# Altium PCB KSP_PCB.PcbDoc (part 1 of 2)
Units mm, origin at the board's own origin, x right, y up, seen from the top; angles counter-clockwise.
Board outline 121 x 121 mm, 2 copper layers (Top Layer, Bottom Layer), stack 1.571 mm thick; 210 components, 141 nets, 724 pads, 132 vias.
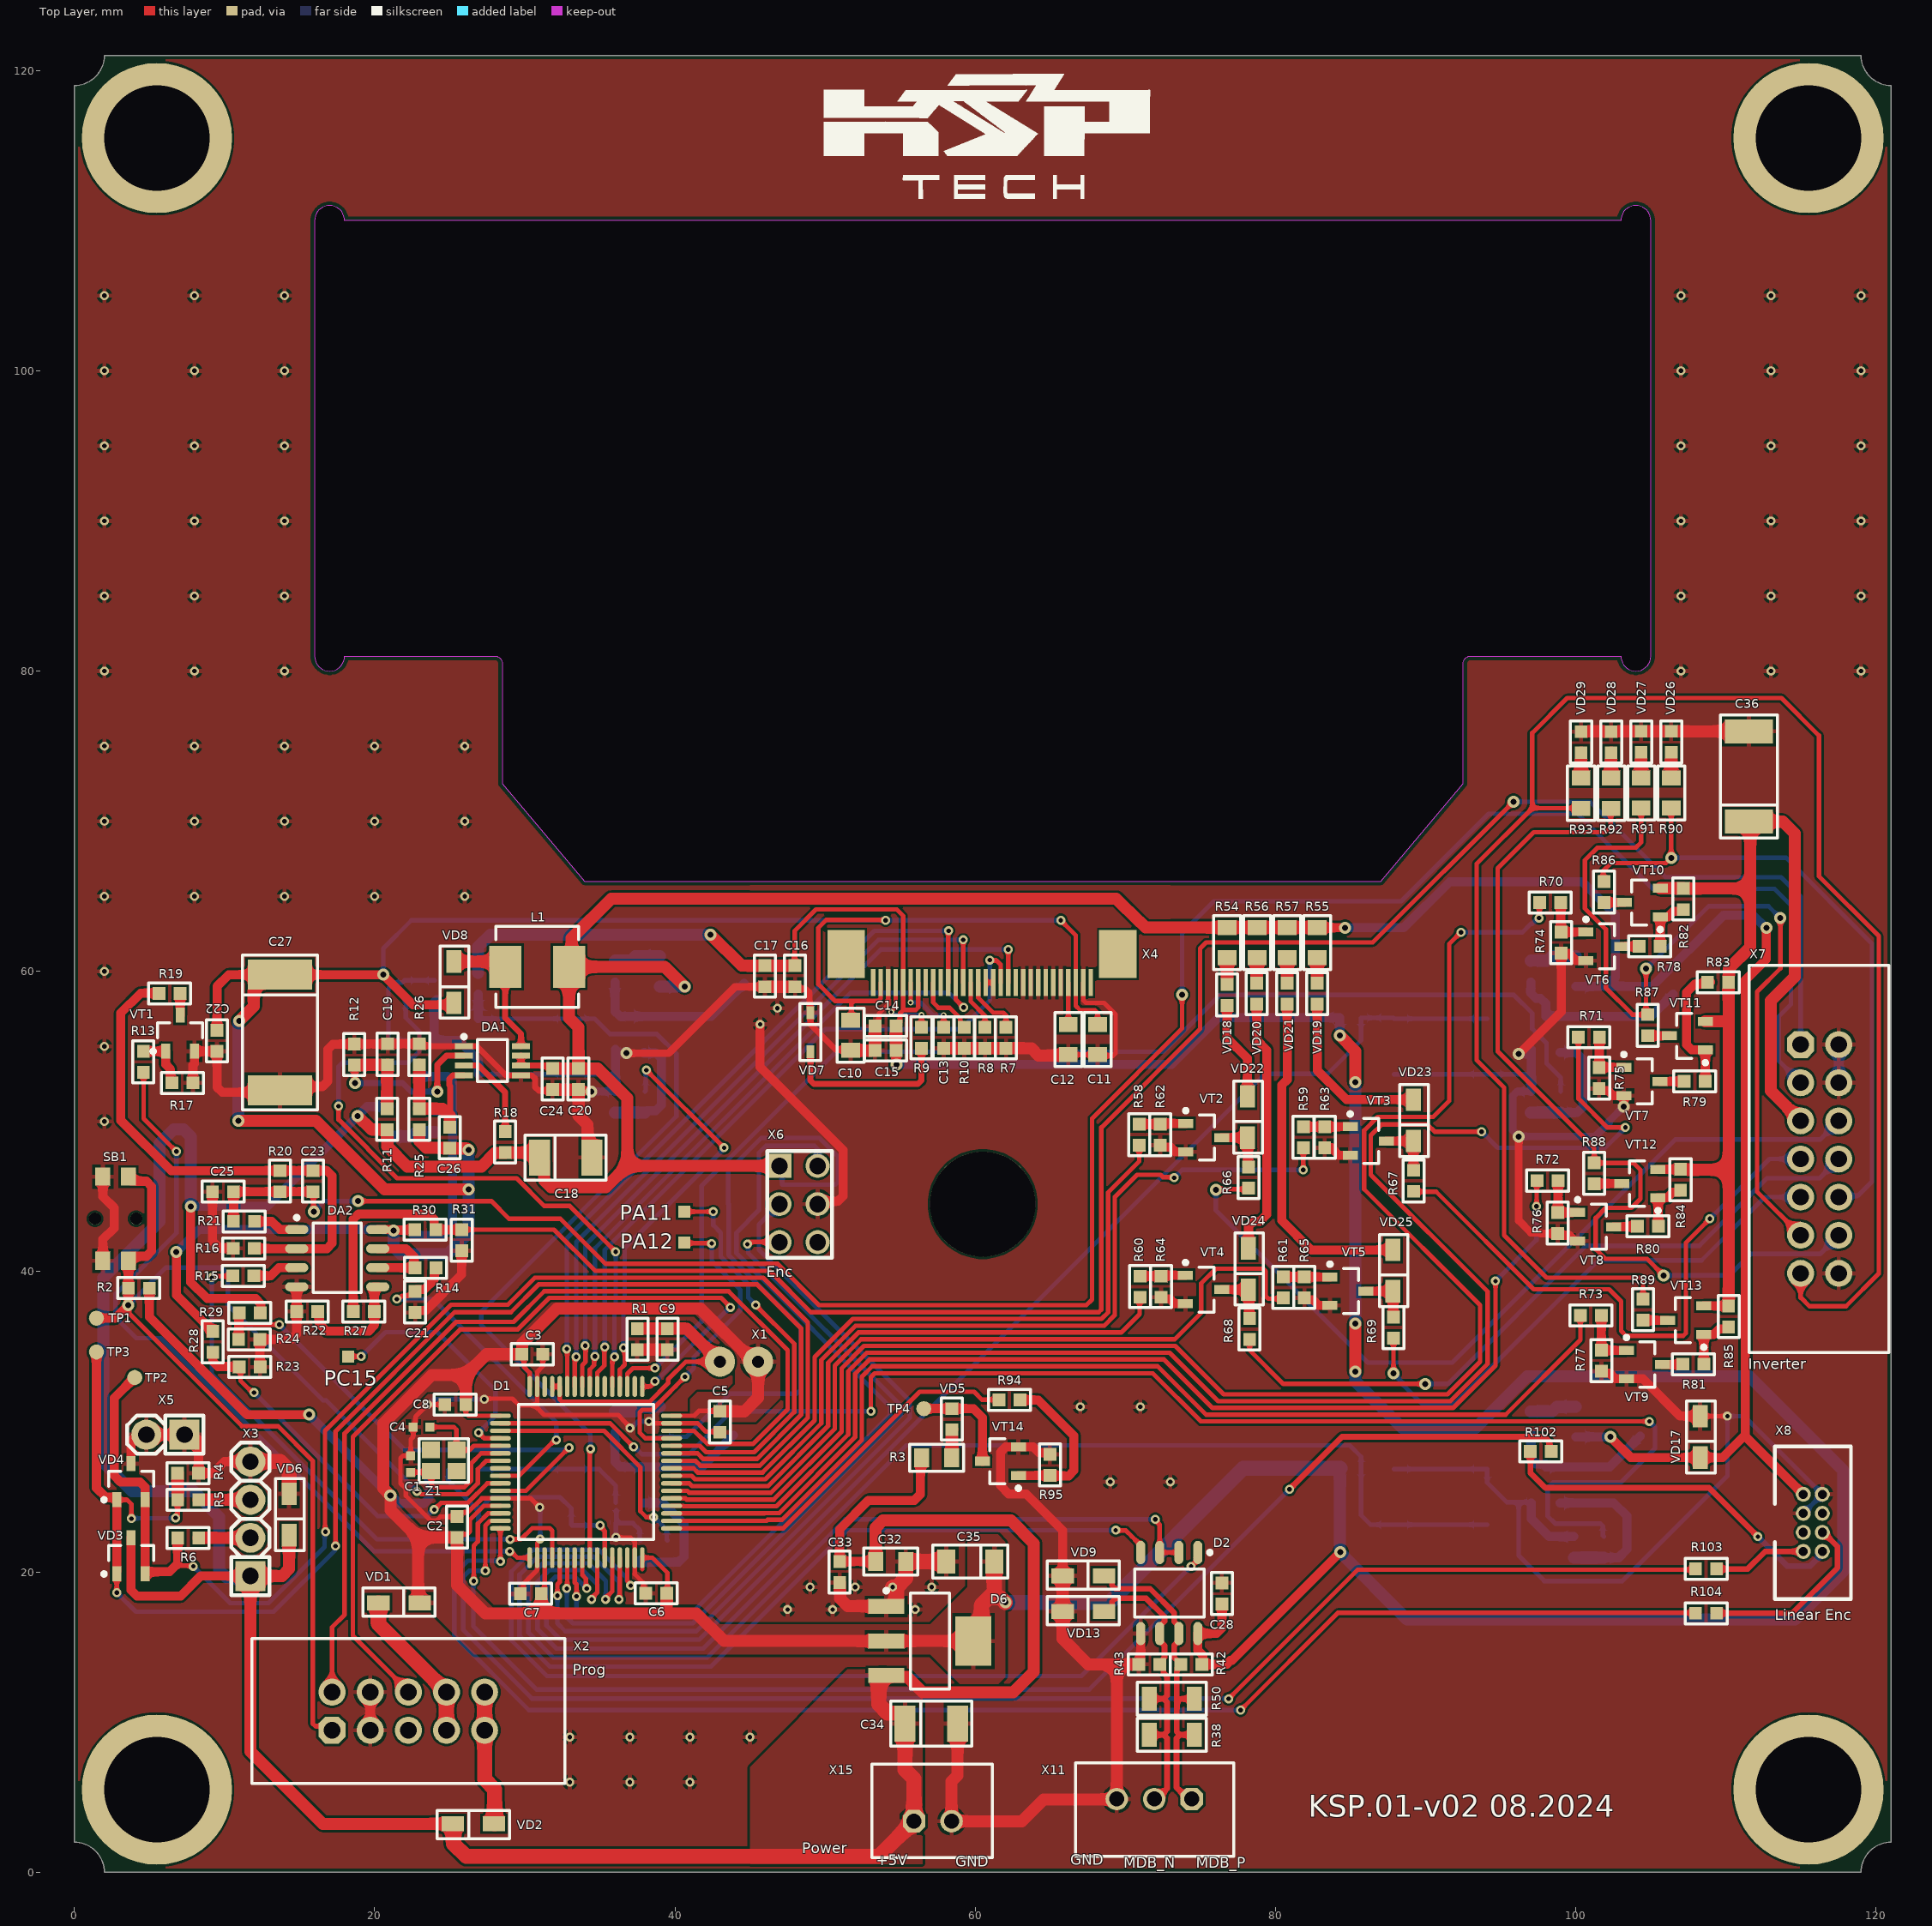
[diagram p0: Top Layer view]
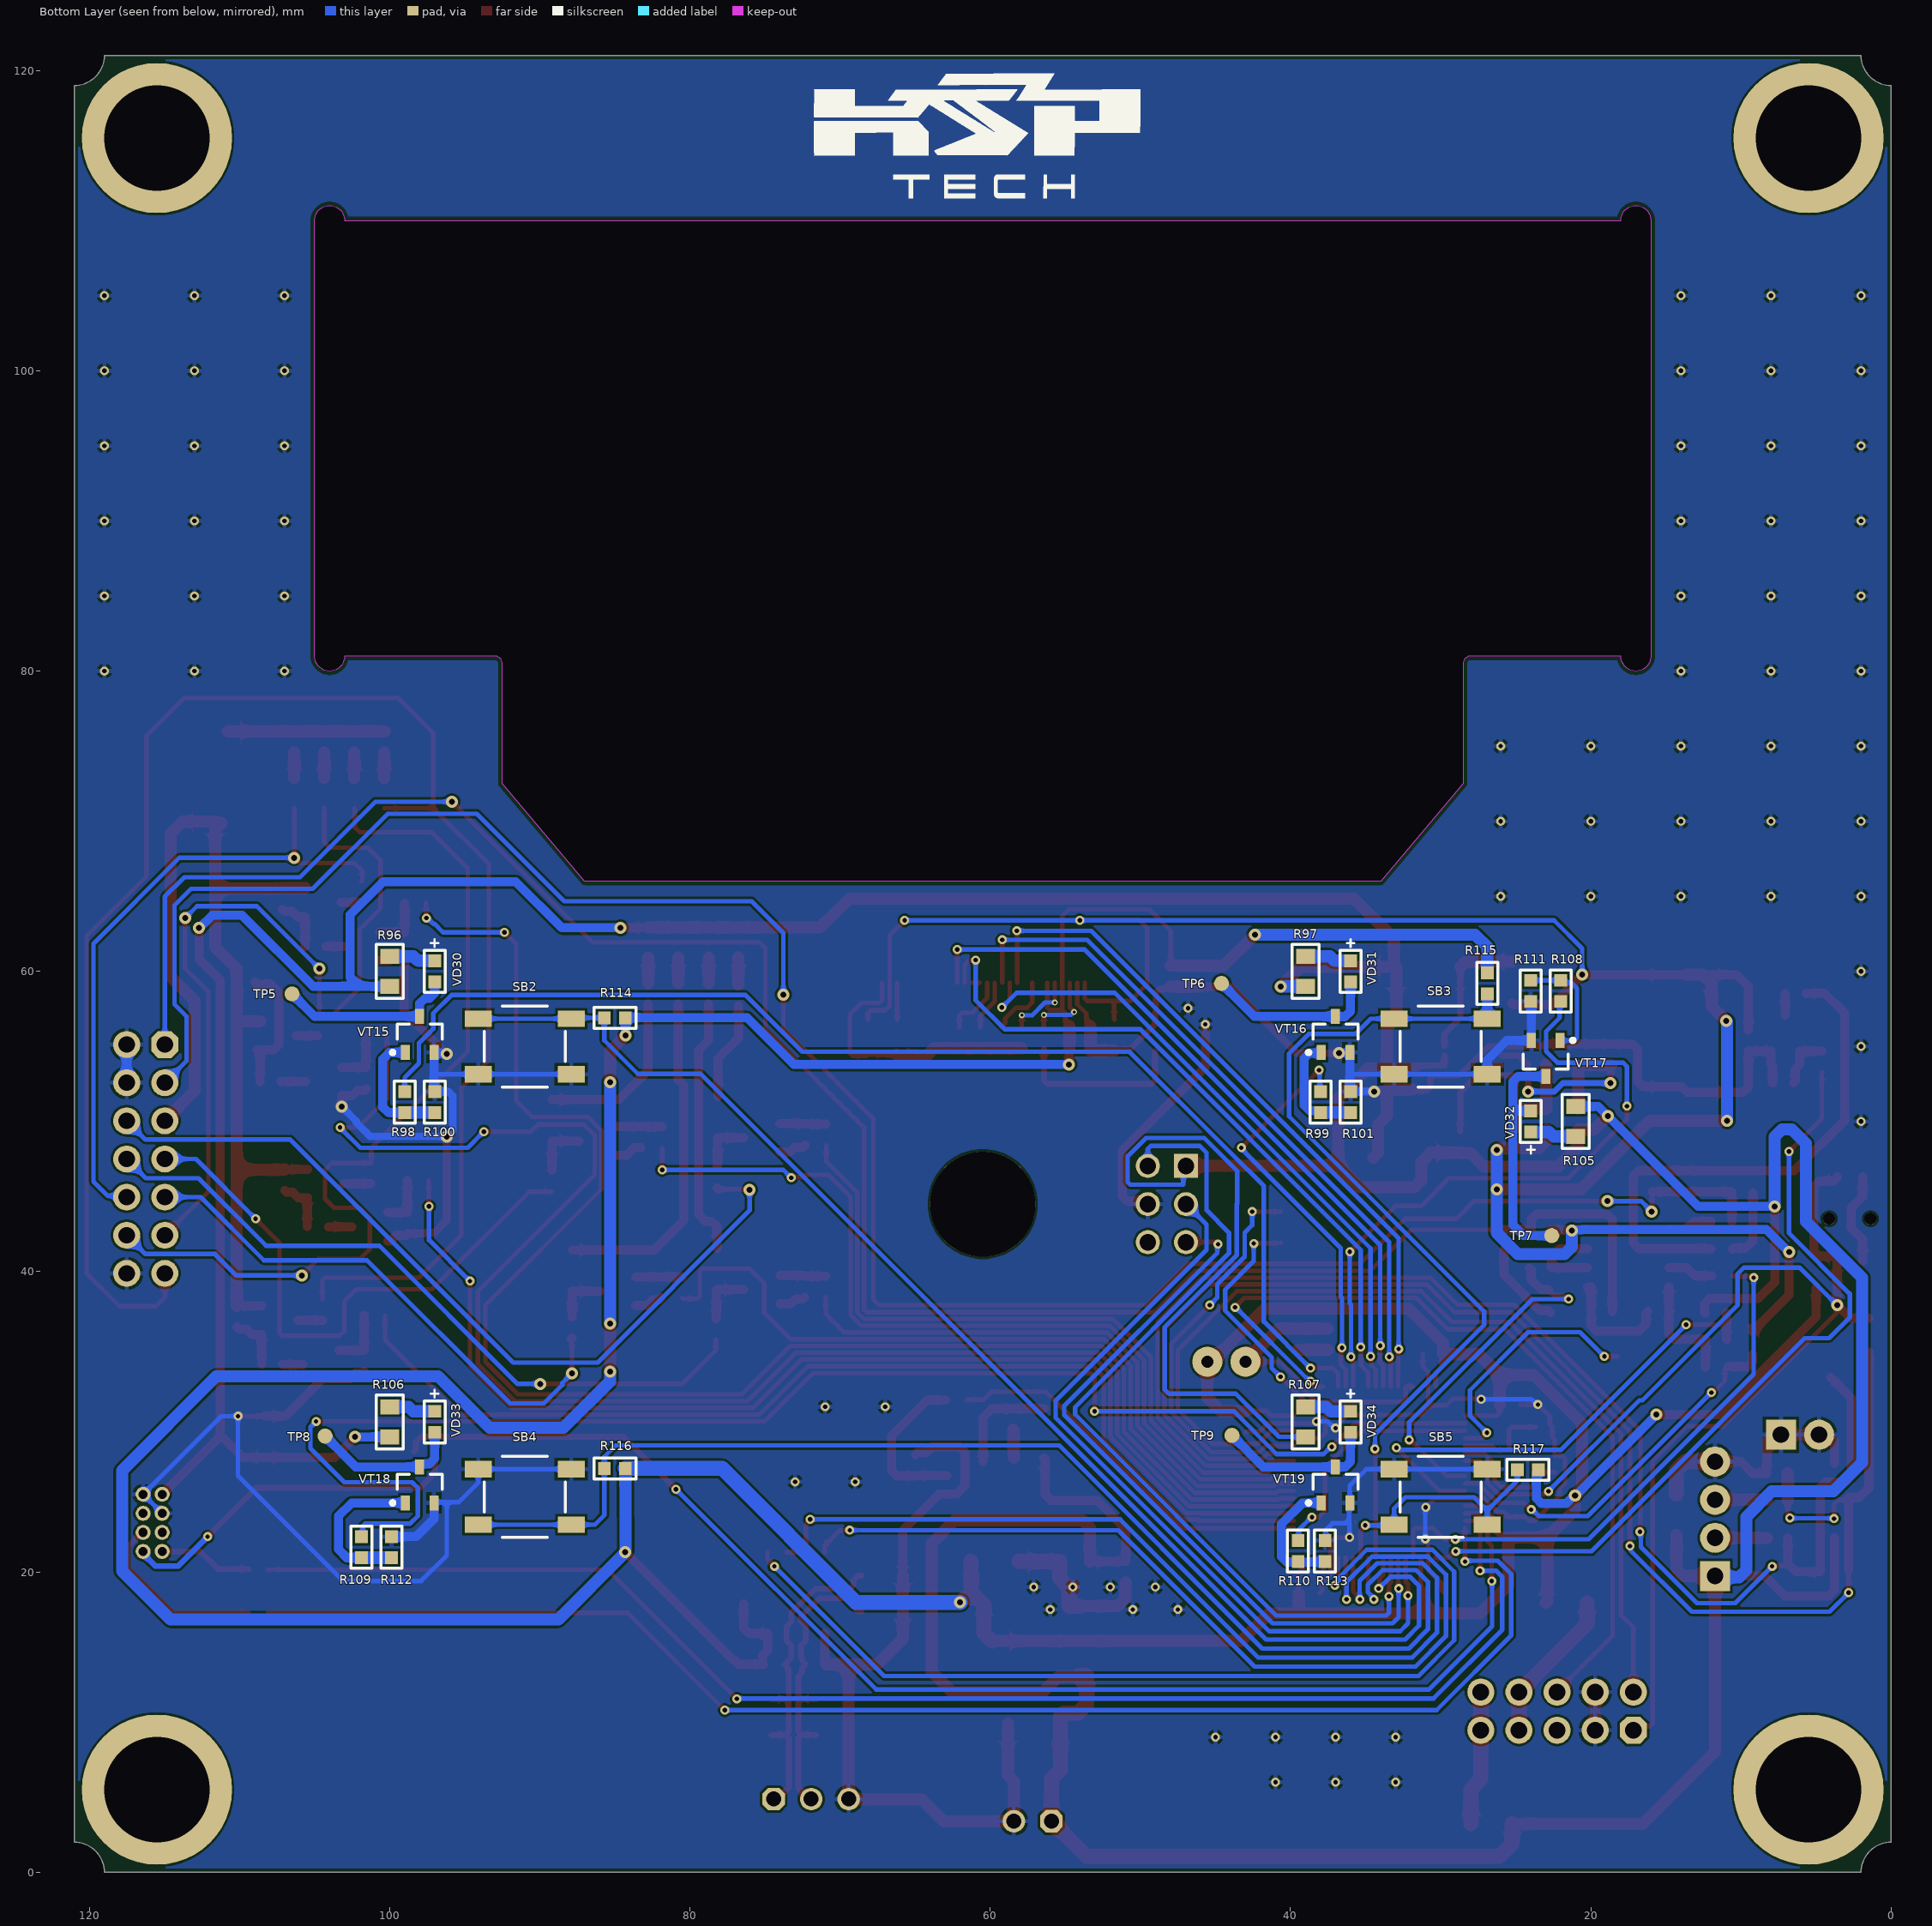
[diagram p1: Bottom Layer view, seen from below]
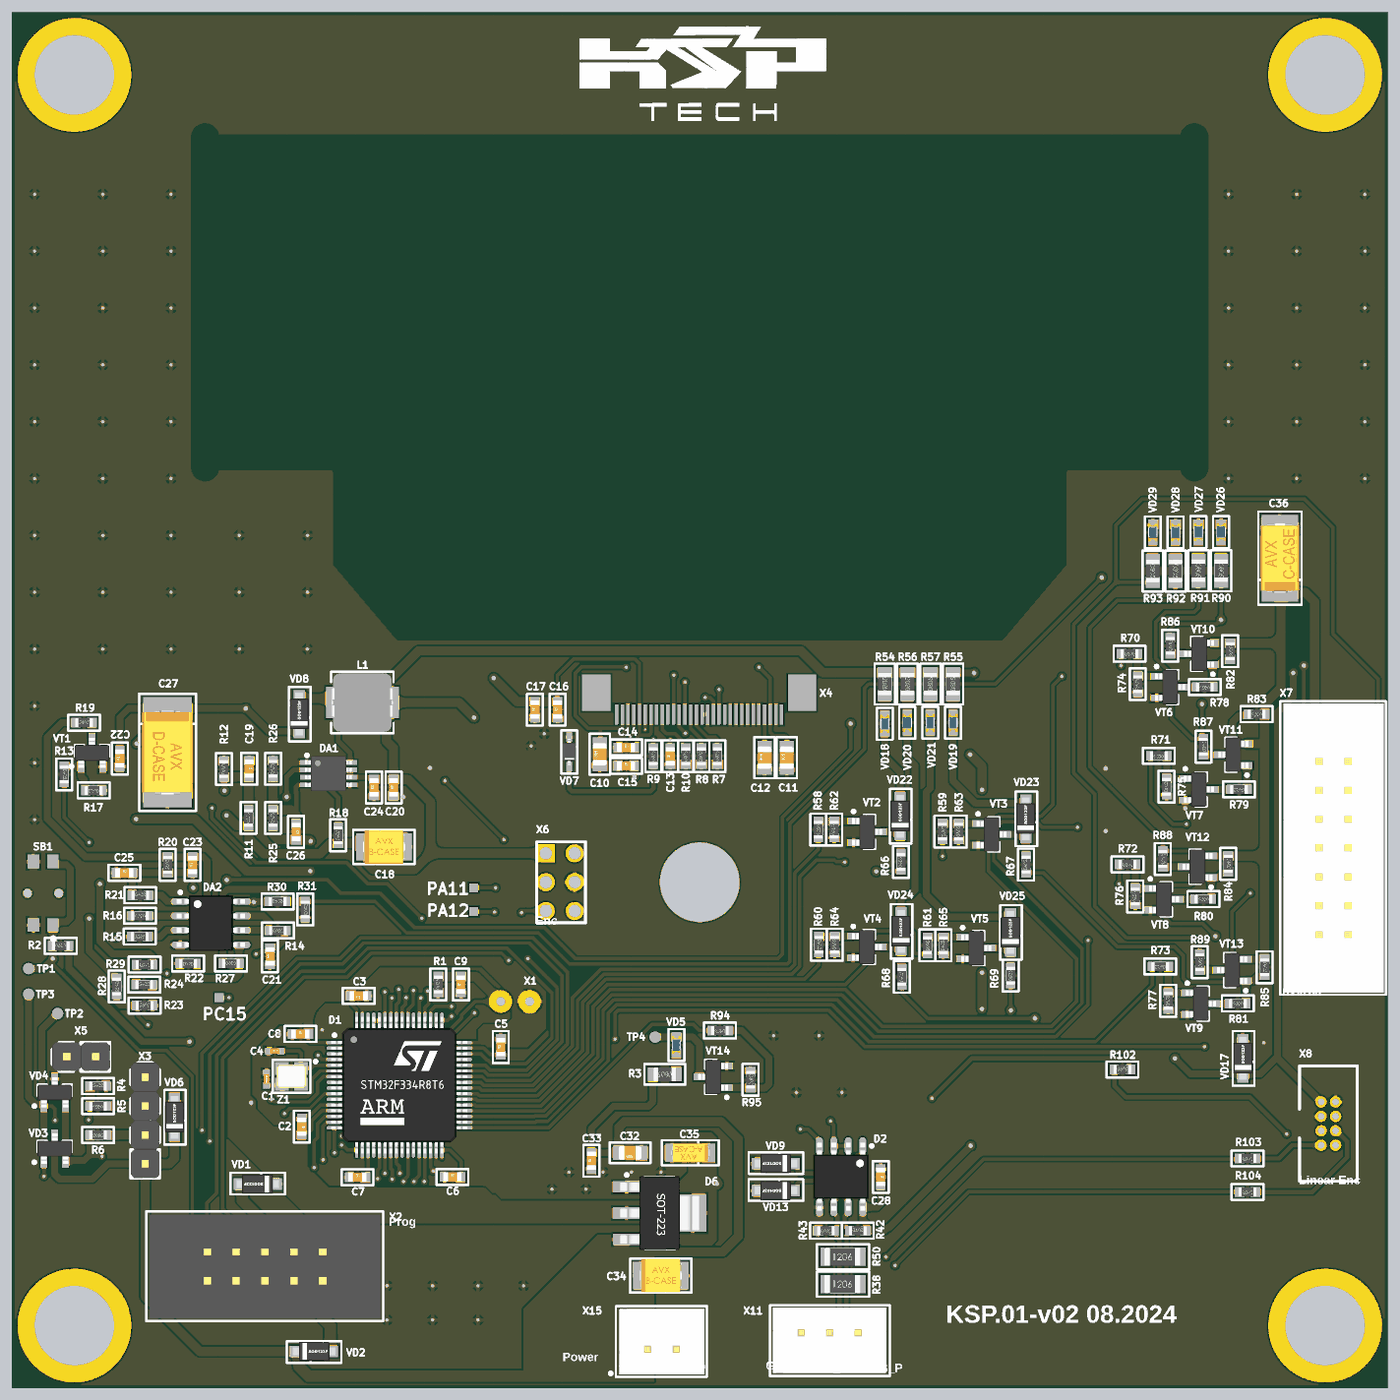
[diagram p3: 3D render of the assembled board from above, using the file's embedded part models]
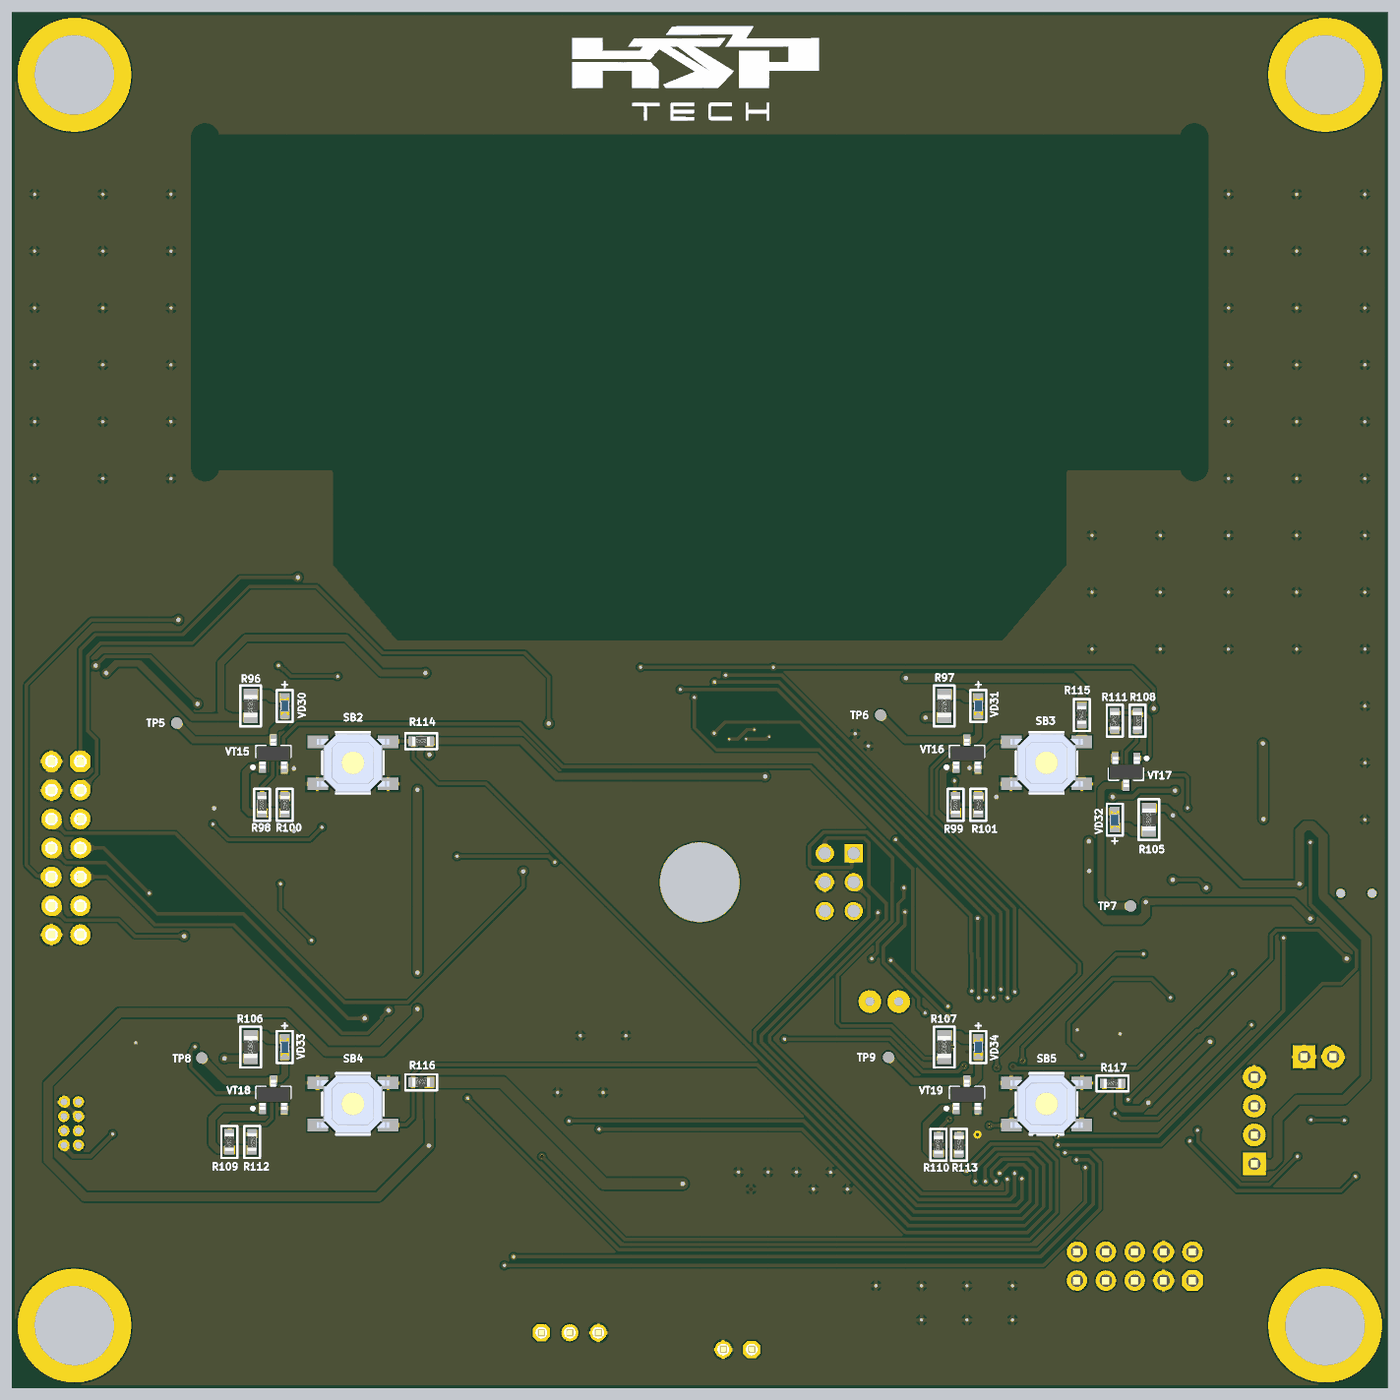
[diagram p4: 3D render of the assembled board from below, using the file's embedded part models]

## Layer stack, top to bottom
Top Solder: solder mask 0.0102, Solder Resist, Dk 3.5
Top Layer: signal copper 0.0356
Dielectric 1: dielectric 1.5, FR-4, Dk 4.8
Bottom Layer: signal copper 0.0356
Bottom Solder: solder mask 0.0102, Solder Resist, Dk 3.5

## Board outline
0,2 0,119 ccw(c0,121) 2,121 119,121 ccw(c121,121) 121,119 121,2 ccw(c121,0) 119,0 2,0 ccw(c0,0)
cut-out: 18,81 28,81 cw(c28,80.5) 28.5,80.5 28.5,72.5 34,66 87,66 92.5,72.5 92.5,80.5 cw(c93,80.5) 93,81 103,81 ccw(c104,81) 104,80 ccw(c104,81) 105,81 105,110 ccw(c104,110) 104,111 ccw(c104,110) 103,110 18,110 ccw(c17,110) 17,111 ccw(c17,110) 16,110 16,81 ccw(c17,81) 17,80 ccw(c17,81)

## Design rules (kind name [scope] priority, off if disabled: settings)
AcuteAngle [All] p1: minimum=3.50000000000000E+0001 checktracksonly=FALSE
BoardOutlineClearance "BoardOutlineClearance 1" [All] p1: gap=0.25 ignorepadtopadclearanceinfootprint=FALSE except(0: Arc-SplitContinuation Track-SplitContinuation SMDPad-SplitContinuation THPad-SplitContinuation Via-SplitContinuation Fill-SplitContinuation Poly-SplitContinuation Region-SplitContinuation Text-SplitContinuation) // Milling
BoardOutlineClearance "BoardOutlineClearance 2" [All] p2: gap=0.4 ignorepadtopadclearanceinfootprint=FALSE except(0: Arc-SplitContinuation Track-SplitContinuation SMDPad-SplitContinuation THPad-SplitContinuation Via-SplitContinuation Fill-SplitContinuation Poly-SplitContinuation Region-SplitContinuation Text-SplitContinuation) // V-Cut
Clearance "Clearance-1 1/2 Oz" [All] p1: gap=0.15 ignorepadtopadclearanceinfootprint=FALSE // Standart
ComponentClearance [All] p1: gap=0 collisioncheckmode=3 verticalgap=0 showdistances=FALSE
DiffPairsRouting "DiffPairsRouting 1/2 Oz" [All] p1: maxlimit=0.254 minlimit=0.1 mostfreqgap=0.254 toplayer_minwidth=0.1 toplayer_maxwidth=0.381 toplayer_prefwidth=0.381 bottomlayer_minwidth=0.1 bottomlayer_maxwidth=0.381 bottomlayer_prefwidth=0.381 maxuncoupledlength=12.7
HoleSize "Minimum HoleSize VIA 1" [IsVia] p1: absolutevalues=TRUE maxlimit=5.9 minlimit=0.3 maxpercent=80.000 minpercent=20.000 // Standart
HoleToHoleClearance Hole2HoleClearance [All] p1: gap=0.25 allowstackedmicrovias=FALSE
MinimumAnnularRing "Minimum AR VIA Standart" [IsVia] p1: minimumring=0.15
MinimumAnnularRing "Minimum AR PAD Standart" [IsPAD] p2: minimumring=0.2
MinimumAnnularRing "Minimum AR VIA Advance" [IsVia] p3: minimumring=0.1
MinimumAnnularRing "Minimum AR PAD Advance" [IsPAD] p4: minimumring=0.15
MinimumSolderMaskSliver "SolderMask Bridge Standart" [All] p1: minsoldermaskwidth=0.15 // All Masks
MinimumSolderMaskSliver "SolderMask Bridge Advance" [All] p2: minsoldermaskwidth=0.1 // Mask LDI
PlaneClearance "PlaneClearance-1 1/2 Oz" [All] p1: clearance=0.2 // Standart
PlaneClearance "PlaneClearance-2 1/2 Oz" [All] p2: clearance=0.15 // Advance
PlaneConnect "TermalConnect-1 1/2 Oz" [All] p1: planeconnectstyle=Relief reliefexpansion=0.2 reliefentries=4 reliefconductorwidth=0.4 reliefairgap=0.2 // Standart
PlaneConnect "TermalConnect-2 1/2 Oz" [All] p2: pad.planeconnectstyle=Relief pad.reliefexpansion=0.15 pad.reliefentries=4 pad.reliefconductorwidth=0.15 pad.reliefairgap=0.15 via.planeconnectstyle=Direct via.reliefexpansion=0.15 via.reliefentries=4 via.reliefconductorwidth=0.15 via.reliefairgap=0.15 // Advance
PolygonConnect "PolygonConnect-1 1/2 Oz" [All] p1: thpad.connectstyle=Relief thpad.reliefconductorwidth=0.3 thpad.reliefentries=4 thpad.polygonreliefangle="90 Angle" thpad.airgapwidth=0.2 smdpad.connectstyle=Relief smdpad.reliefconductorwidth=0.3 smdpad.reliefentries=4 smdpad.polygonreliefangle="90 Angle" smdpad.airgapwidth=0.2 via.connectstyle=Direct via.reliefconductorwidth=0.254 via.reliefentries=4 via.polygonreliefangle="90 Angle" via.airgapwidth=0.254 // Standart
RoutingCorners [All] p1 off: cornerstyle=45-Degree minsetback=2.54 maxsetback=2.54
RoutingVias [All] p1: holewidth=0.3 width=0.6 viastyle="Through Hole" minholewidth=0.2 minwidth=0.4 maxholewidth=5.9 maxwidth=6.4
SilkToSilkClearance Silk2SilkClearance [All] p1 off: silktosilkclearance=0.15
SilkToSolderMaskClearance Silk2SolderMaskClearance [IsPad] p1 off: minsilkscreentomaskgap=0.15 clearancetoexposedcopper=TRUE
SolderMaskExpansion SolderMaskExpansion-1 [All] p1: expansion=0.05 istentingtop=FALSE // Standart
SolderMaskExpansion "SolderMaskExpansion LDI" [All] p2: expansion=0.025 istentingtop=FALSE // Advance
SupplyNets "Schematic Supply Nets_2" [InNet('12V')] p1: voltage=12,00
SupplyNets "Schematic Supply Nets_1" [InNet('5V')] p2: voltage=5,000
SupplyNets "Schematic Supply Nets" [InNet('3.3V')] p3: voltage=3,000
UnRoutedNet [All] p1: checkbadconnections=TRUE
Width "Width 1/2 Oz" [All] p1: maxlimit=10 minlimit=0.1 preferedwidth=1 checkconnectedcopper=TRUE
19 further rules are at their usual default settings.

## Classes and differential pairs
component class 3_RK: C36 R54 R55 R56 R57 R58 R59 R60 R61 R62 R63 R64 R65 R66 R67 R68 R69 R70 R71 R72 R73 R74 R75 R76 R77 R78 R79 R80 R81 R82 R83 R84 R85 R86 R87 R88 R89 R90 R91 R92 R93 VD18 VD19 VD20 VD21 VD22 VD23 VD24 VD25 VD26 VD27 VD28 VD29 VT2 VT3 VT4 VT5 VT6 VT7 VT8 VT9 VT10 VT11 VT12 VT13
component class 2_Connection: C18 C19 C20 C21 C22 C23 C24 C25 C26 C27 C28 C32 C33 C34 C35 D2 D6 DA1 DA2 L1 R11 R12 R13 R14 R15 R16 R17 R18 R19 R20 R21 R22 R23 R24 R25 R26 R27 R28 R29 R30 R31 R38 R42 R43 R50 R96 R97 R98 R99 R100 R101 R102 R103 R104 R105 R106 R107 R108 R109 R110 R111 R112 R113 R114 R115 R116 R117 SB2 SB3 SB4 SB5 TP5 TP6 TP7 TP8 TP9 VD8 VD9 VD13 VD17 VD30 VD31 VD32 VD33 VD34 VT1 VT15 VT16 VT17 VT18 VT19 X6 X7 X8 X11 X15
component class 1_uC: C1 C2 C3 C4 C5 C6 C7 C8 C9 C10 C11 C12 C13 C14 C15 C16 C17 D1 R1 R2 R3 R4 R5 R6 R7 R8 R9 R10 R94 R95 SB1 TP1 TP2 TP3 TP4 VD1 VD2 VD3 VD4 VD5 VD6 VD7 VT14 X1 X2 X3 X4 X5 Z1
differential pair MODBUS: +MODBUS_P -MODBUS_N

## Components (designator, comment, footprint, x,y, rotation, side; value= is the part's Value field where it differs from the comment)
C1 "10p" CH0402C 22.4,27.175 r270 top
C2 "0.1u" CH0603C 25.5,23 r270 top
C3 "0.1u" CH0603C 30.5,34.5 r180 top
C4 "10p" CH0402C 23.125,29.65 r0 top
C5 "0.1u" CH0603C 43,30 r90 top
C6 "0.1u" CH0603C 38.75,18.575 r0 top
C7 "0.1u" CH0603C 30.399,18.549 r0 top
C8 "0.1u" CH0603C 25.375,31.15 r0 top
C9 "0.1u" CH0603C 39.5,35.5 r90 top
C10 "4.7u, 25V" CH0805C 51.7,55.75 r90 top
C11 "4.7u, 25V" CH0805C 68.15,55.45 r90 top
C12 "4.7u, 25V" CH0805C 66.2,55.45 r90 top
C13 "1u" CH0603C 57.9,55.575 r90 top
C14 "4.7u" CH0603C 54.025,56.35 r0 top
C15 "0.1u" CH0603C 54.025,54.725 r0 top
C16 "4.7u" CH0603C 48,59.675 r90 top
C17 "0.1u" CH0603C 46,59.675 r90 top
C18 "47uF" TANTAL_B 32.725,47.6 r0 top
C19 "0.1u" CH0603C 20.875,54.475 r270 top
C20 "10u" CH0603C 33.575,52.825 r90 top
C21 "0.022u, 50V" CH0603C 22.7,37.975 r90 top
C22 "0.1u, 25V" CH0603C 9.5,55.375 r90 top
C23 "1n" CH0603C 15.9,46.025 r90 top
C24 "0.1u" CH0603C 31.85,52.825 r90 top
C25 "0.022u, 50V" CH0603C 9.9,45.325 r0 top
C26 "39p" CH0603C 25,48.925 r270 top
C27 "68uF" TANTAL_D 13.7,55.925 r270 top
C28 "0.1u" CH0603C 76.425,18.575 r270 top
C32 "10u" CH0805C 54.375,20.7 r180 top
C33 "0.1 u" CH0603C 50.975,20 r90 top
C34 "68uF" TANTAL_B 57.075,9.9 r0 top
C35 "47uF" TANTAL_A 59.675,20.7 r180 top
C36 "4.7uF" TANTAL_C 111.525,72.99 r90 top
D1 "STM32F103RBT6" 64-LQFP 34.075,26.65 r0 top
D2 "ADM3485ARZ" 8-SOIC 72.925,18.6 r270 top
D6 "LM1117GS-3.3" SOT223 56.975,15.4 r0 top
DA1 "LM2621AMMX" 8-SSOP 27.85,54.05 r0 top
DA2 "OP295GSZ-REEL7" 8-SOIC 17.508,40.899 r0 top
L1 "10u" "IND: IHLP2020" 30.825,60.3 r0 top
R1 "10k" CH0603R 37.5,35.5 r90 top
R2 "10k" CH0603R 4.3,38.9 r0 top
R3 "1k" CH0805R 57.425,27.6 r180 top
R4 "10k" CH0603R 7.575,26.575 r0 top
R5 "100" CH0603R 7.583,24.806 r180 top
R6 "100" CH0603R 7.583,22.266 r180 top
R7 "10k" CH0603R 62.05,55.575 r90 top
R8 "10k" CH0603R 60.65,55.575 r90 top
R9 "50" CH0603R 56.425,55.575 r90 top
R10 "604k" CH0603R 59.275,55.575 r90 top
R11 "10k" CH0603R 20.825,50.15 r90 top
R12 "DNP" CH0603R 18.65,54.45 r90 top
R13 "100" CH0603R 4.6,53.975 r270 top
R14 "100" CH0603R 23.4,40.25 r180 top
R15 "3.32k" CH0603R 11.25,39.725 r180 top
R16 "17.8k" CH0603R 11.275,41.55 r180 top
R17 "4.7k" CH0603R 7.2,52.575 r180 top
R18 "76.8k" CH0603R 28.7,48.625 r90 top
R19 "6.49k" CH0603R 6.35,58.525 r0 top
R20 "10k" CH0603R 13.7,46.025 r90 top
R21 "10" CH0603R 11.3,43.35 r0 top
R22 "4.7k" CH0603R 15.5,37.35 r180 top
R23 "2.7k" CH0603R 11.675,33.65 r0 top
R24 "10k" CH0603R 11.644,35.491 r0 top
R25 "130k" CH0603R 22.975,50.15 r90 top
R26 "15k" CH0603R 22.975,54.475 r90 top
R27 "10k" CH0603R 19.275,37.35 r0 top
R28 "10k" CH0603R 9.225,35.325 r270 top
R29 "10k" CH0603R 11.675,37.25 r180 top
R30 "1M" CH0603R 23.375,42.8 r0 top
R31 "10k" CH0603R 25.8,42.1 r270 top
R38 "120" CH1206R 73.1,9.15 r0 top
R42 "1.2k" CH0603R 74.4,13.85 r0 top
R43 "1.2k" CH0603R 71.6,13.85 r180 top
R50 "Var" CH1206R 73.1,11.55 r0 top
R54 "1k" CH0805R 76.775,61.925 r90 top
R55 "1k" CH0805R 82.775,61.925 r90 top
R56 "1k" CH0805R 78.775,61.925 r90 top
R57 "1k" CH0805R 80.775,61.925 r90 top
R58 "100" CH0603R 70.925,49.125 r270 top
R59 "100" CH0603R 81.85,48.95 r270 top
R60 "100" CH0603R 70.975,39 r270 top
R61 "100" CH0603R 80.525,38.95 r270 top
R62 "4.7k" CH0603R 72.325,49.125 r90 top
R63 "4.7k" CH0603R 83.275,48.95 r90 top
R64 "4.7k" CH0603R 72.375,39 r90 top
R65 "4.7k" CH0603R 81.925,38.95 r90 top
R66 "10" CH0603R 78.2,46.275 r90 top
R67 "10" CH0603R 89.2,46.05 r90 top
R68 "10" CH0603R 78.275,36.175 r90 top
R69 "10" CH0603R 87.85,36.275 r90 top
R70 "100" CH0603R 98.3,64.59 r180 top
R71 "100" CH0603R 100.875,55.615 r180 top
R72 "100" CH0603R 98.125,46.065 r180 top
R73 "100" CH0603R 101,37.09 r180 top
R74 "4.7k" CH0603R 99.025,61.915 r90 top
R75 "4.7k" CH0603R 101.55,52.89 r90 top
R76 "4.7k" CH0603R 98.8,43.24 r90 top
R77 "4.7k" CH0603R 101.7,34.065 r90 top
R78 "100" CH0603R 104.925,61.665 r180 top
R79 "100" CH0603R 107.925,52.665 r180 top
R80 "100" CH0603R 104.8,43.015 r180 top
R81 "100" CH0603R 107.825,33.84 r180 top
R82 "4.7k" CH0603R 107.15,64.815 r270 top
R83 "4.7k" CH0603R 109.475,59.275 r180 top
R84 "4.7k" CH0603R 106.975,46.115 r270 top
R85 "4.7k" CH0603R 110.175,37.015 r270 top
R86 "10" CH0603R 101.875,65.29 r270 top
R87 "10" CH0603R 104.8,56.415 r270 top
R88 "10" CH0603R 101.225,46.54 r270 top
R89 "10" CH0603R 104.475,37.465 r270 top
R90 "1k" CH0805R 106.35,71.89 r270 top
R91 "1k" CH0805R 104.35,71.89 r270 top
R92 "1k" CH0805R 102.35,71.865 r270 top
R93 "1k" CH0805R 100.35,71.865 r270 top
R94 "100" CH0603R 62.275,31.45 r180 top
R95 "4.7k" CH0603R 64.975,27.125 r270 top
R96 "1k" CH0805R 100,60 r270 bottom
R97 "1k" CH0805R 39,60 r270 bottom
R98 "100" CH0603R 99,51.3 r90 bottom
R99 "100" CH0603R 38,51.3 r90 bottom
R100 "4.7k" CH0603R 97,51.3 r270 bottom
R101 "4.7k" CH0603R 36,51.3 r270 bottom
R102 "DNP" CH0603R 97.675,28.025 r0 top
R103 "DNP" CH0603R 108.675,20.2 r180 top
R104 "DNP" CH0603R 108.675,17.25 r180 top
R105 "1k" CH0805R 21,50 r90 bottom
R106 "1k" CH0805R 100,30 r270 bottom
R107 "1k" CH0805R 39,30 r270 bottom
R108 "100" CH0603R 22,58.7 r270 bottom
R109 "100" CH0603R 101.874,21.65 r90 bottom
R110 "100" CH0603R 39.5,21.4 r90 bottom
R111 "4.7k" CH0603R 24,58.7 r90 bottom
R112 "4.7k" CH0603R 99.874,21.65 r270 bottom
R113 "4.7k" CH0603R 37.7,21.4 r270 bottom
R114 "10k" CH0603R 85,56.9 r180 bottom
R115 "10k" CH0603R 26.9,59.2 r90 bottom
R116 "10k" CH0603R 85,26.9 r180 bottom
R117 "10k" CH0603R 24.2,26.8 r180 bottom
SB1 "\"Кнопка\"" TL1014BF160QG 4.125,43.525 r270 top
SB2 "\"Кнопка\"" "BUT: SKQGADE010" 91,55 r180 bottom locked
SB3 "\"Кнопка\"" "BUT: SKQGADE010" 30,55 r180 bottom locked
SB4 "\"Кнопка\"" "BUT: SKQGADE010" 91,25 r0 bottom locked
SB5 "\"Кнопка\"" "BUT: SKQGADE010" 30,25 r0 bottom locked
TP1 "=value" TestPoint#1 1.475,36.9 r90 top
TP2 "=value" TestPoint#1 4.025,32.95 r90 top
TP3 "=value" TestPoint#1 1.475,34.65 r90 top
TP4 "=value" TestPoint#1 56.575,30.875 r180 top
TP5 "=value" TestPoint#1 106.5,58.5 r90 bottom
TP6 "=value" TestPoint#1 44.6,59.2 r90 bottom
TP7 "=value" TestPoint#1 22.6,42.4 r90 bottom
TP8 "=value" TestPoint#2 104.3,28.125 r90 bottom
TP9 "=value" TestPoint#1 43.9,29.1 r90 bottom
VD1 "PMEG6010CEH" SOD123F 21.625,17.95 r0 top
VD2 "PMEG6010CEH" SOD123F 26.575,3.225 r180 top
VD3 "BAT54C" SOT23_123 3.777,21.066 r90 top
VD4 "PESD5V0L2BT" SOT23_132 3.777,26.006 r90 top
VD5 "*" CH0603LB 58.45,30.175 r90 top
VD6 "SMF5.0A" SOD123F 14.3,23.825 r270 top
VD7 "1N4148WS" SOD323 49.025,55.95 r90 top
VD8 "PMEG6010CEH" SOD123F 25.275,59.275 r270 top
VD9 "SMF5.0A" SOD123F 67.2,19.75 r0 top
VD13 "SMF5.0A" SOD123F 67.2,17.375 r0 top
VD17 "SMF5.0A" SOD123F 108.275,29 r270 top
VD18 "RED" CH0603LB 76.775,58.425 r270 top
VD19 "RED" CH0603LB 82.775,58.525 r270 top
VD20 "RED" CH0603LB 78.75,58.525 r270 top
VD21 "RED" CH0603LB 80.775,58.525 r270 top
VD22 "PMEG6010CEH" SOD123F 78.125,50.3 r270 top
VD23 "PMEG6010CEH" SOD123F 89.175,50.075 r270 top
VD24 "PMEG6010CEH" SOD123F 78.2,40.175 r270 top
VD25 "PMEG6010CEH" SOD123F 87.825,40.075 r270 top
VD26 "RED" CH0603LB 106.35,75.29 r90 top
VD27 "GREEN" CH0603LB 104.35,75.29 r90 top
VD28 "YELLOW" CH0603LB 102.35,75.265 r90 top
VD29 "BLUE" CH0603LB 100.35,75.265 r90 top
VD30 "BLUE" CH0603LB 97,60 r270 bottom
VD31 "BLUE" CH0603LB 36,60 r270 bottom
VD32 "BLUE" CH0603LB 24,50 r90 bottom
VD33 "BLUE" CH0603LB 97,30 r270 bottom
VD34 "BLUE" CH0603LB 36,30 r270 bottom
VT1 "2N7002" SOT23_123 7.05,55.875 r90 top
VT2 "2N7002" SOT23_123 75.225,48.925 r0 top
VT3 "2N7002" SOT23_123 86.175,48.7 r0 top
VT4 "2N7002" SOT23_123 75.206,38.807 r0 top
VT5 "2N7002" SOT23_123 84.825,38.7 r0 top
VT6 "2N7002" SOT23_123 101.875,61.665 r0 top
VT7 "2N7002" SOT23_123 104.4,52.665 r0 top
VT8 "2N7002" SOT23_123 101.325,42.99 r0 top
VT9 "2N7002" SOT23_123 104.575,33.815 r0 top
VT10 "BSH201,215" SOT23_123 104.425,64.59 r180 top
VT11 "BSH201,215" SOT23_123 107.425,55.715 r180 top
VT12 "BSH201,215" SOT23_123 104.275,45.865 r180 top
VT13 "BSH201,215" SOT23_123 107.325,36.765 r180 top
VT14 "2N7002" SOT23_123 61.675,27.375 r180 top
VT15 "2N7002" SOT23_123 98,55.8 r90 bottom
VT16 "2N7002" SOT23_123 37,55.8 r90 bottom
VT17 "2N7002" SOT23_123 23,54.2 r270 bottom
VT18 "2N7002" SOT23_123 98,25.8 r90 bottom
VT19 "2N7002" SOT23_123 37,25.8 r90 bottom
X1 "JMP-2" PLS-2 43,34 r0 top
X2 "KLS1-202-10-T-B" "CON: IDC-10MS" 22.245,10.73 r0 top
X3 "DS1021-1X4" "CON: PLS-4" 11.725,23.541 r90 top
X4 "Conn" FPC-30 53.2,59.25 r0 top
X5 "DNP" "CON: PLS-2" 6.066,29.141 r180 top
X6 "DS1021-2X3" "CON: PLD-6 (without body)" 46.96,47.04 r270 top locked
X7 "KLS1-202-14-T-B" "CON: IDC-14MS" 116.245,47.505 r270 top
X8 "DC3 2X4P" "CON: DC3 2X4P" 115.15,25.175 r270 top
X11 "KLS1-2.50-03-S" "CON: CWF-3" 71.925,4.875 r180 top
X15 "KLS1-2.50-02-S" "CON: CWF-2" 57.175,3.4 r0 top
Z1 "12MHz" "OSC: 2520" 25.45,28.125 r180 top

## Footprints (in the part's own frame and the unit in brackets; to place one, negate y for a bottom-side part, rotate by r counter-clockwise, add the part's x,y. Pads: shape width x height; smd on the part's side, far side on the other; paste and mask are expansions set on the pad)
8-SOIC [mm]
  rrect100% 1.55x0.6 smd: 1(-2.7,1.905) 2(-2.7,0.635) 3(-2.7,-0.635) 4(-2.7,-1.905) 5(2.7,-1.905) 6(2.7,-0.635) 7(2.7,0.635) 8(2.7,1.905)
  round 0.7 on Mech1: 28(-2.395,1.8)
  silkscreen extent -2.82,-2.3 1.6,2.83, body extent -3,-2.45 3,2.45, height 1.75
8-SSOP [mm] "VSSOP, 8-Leads, Body 3,10x3,10mm, Pitch 0,65mm"
  rect 1.2x0.4 smd: 1(-1.9,0.975) 2(-1.9,0.325) 3(-1.9,-0.325) 4(-1.9,-0.975) 5(1.9,-0.975) 6(1.9,-0.325) 7(1.9,0.325) 8(1.9,0.975)
  round 0.5 on Mech1: ""(-1.6,1.1)
  silkscreen extent -2.02,-1.4 1,1.72, body extent -2.05,-1.55 2.05,1.55, height 1.1
64-LQFP [mm] "Thin QFP, 64-Leads, Body 10x10mm, Pitch 0.5mm, IPC Medium Density"
  oval 1.4x0.3 smd: 1(-5.7,3.75) 2(-5.7,3.25) 3(-5.7,2.75) 4(-5.7,2.25) 5(-5.7,1.75) 6(-5.7,1.25) 7(-5.7,0.75) 8(-5.7,0.25) 9(-5.7,-0.25) 10(-5.7,-0.75) 11(-5.7,-1.25) 12(-5.7,-1.75) 13(-5.7,-2.25) 14(-5.7,-2.75) 15(-5.7,-3.25) 16(-5.7,-3.75) 33(5.7,-3.75) 34(5.7,-3.25) 35(5.7,-2.75) 36(5.7,-2.25) 37(5.7,-1.75) 38(5.7,-1.25) 39(5.7,-0.75) 40(5.7,-0.25) 41(5.7,0.25) 42(5.7,0.75) 43(5.7,1.25) 44(5.7,1.75) 45(5.7,2.25) 46(5.7,2.75) 47(5.7,3.25) 48(5.7,3.75)
  round 0.5 on Mech1: 1(-5.4,5.4)
  oval 0.3x1.4 smd: 17(-3.75,-5.7) 18(-3.25,-5.7) 19(-2.75,-5.7) 20(-2.25,-5.7) 21(-1.75,-5.7) 22(-1.25,-5.7) 23(-0.75,-5.7) 24(-0.25,-5.7) 25(0.25,-5.7) 26(0.75,-5.7) 27(1.25,-5.7) 28(1.75,-5.7) 29(2.25,-5.7) 30(2.75,-5.7) 31(3.25,-5.7) 32(3.75,-5.7) 49(3.75,5.7) 50(3.25,5.7) 51(2.75,5.7) 52(2.25,5.7) 53(1.75,5.7) 54(1.25,5.7) 55(0.75,5.7) 56(0.25,5.7) 57(-0.25,5.7) 58(-0.75,5.7) 59(-1.25,5.7) 60(-1.75,5.7) 61(-2.25,5.7) 62(-2.75,5.7) 63(-3.25,5.7) 64(-3.75,5.7)
  round 0.5 on Top Overlay: ""(-5.7,4.4)
  silkscreen extent -4.5,-4.5 4.5,4.5, body extent -6,-6 6,6, height 1.5
"BUT: SKQGADE010" [mm]
  rect 1.8x1.1 smd: 1(-3.1,1.85) 1(3.1,1.85) 2(-3.1,-1.85) 2(3.1,-1.85)
  silkscreen extent -2.7,-2.7 2.7,2.7, body extent -3.2,-2.6 3.2,2.6, height 1.45
CH0402C [mm]
  rect 0.6x0.6 smd: 1(-0.55,0) 2(0.55,0)
  body extent -0.51,-0.25 0.51,0.25, height 0.51
CH0603C [mm] "Chip Capacitor, 2-Leads, Body 1,53x0,85mm, IPC Medium Density"
  rect 0.85x0.85 smd: 1(-0.7,0) 2(0.7,0)
  silkscreen extent -1.4,-0.7 1.4,0.7, body extent -0.8,-0.4 0.8,0.4, height 0.3
CH0603LB [mm] "Chip Capacitor, 2-Leads, Body 1,53x0,85mm, IPC Medium Density"
  rect 0.85x0.85 smd: 1(-0.7,0) 2(0.7,0)
  silkscreen extent -1.4,-0.7 1.4,0.7, body extent -0.8,-0.4 0.8,0.4, height 0.6
CH0603R [mm]
  rect 0.85x0.85 smd: 1(-0.7,0) 2(0.7,0)
  silkscreen extent -1.4,-0.7 1.4,0.7, body extent -0.8,-0.4 0.8,0.4, height 0.44
CH0805C [mm] "Chip Capacitor, 2-Leads, Body 2,00x1,20mm, IPC Medium Density"
  rect 1x1.25 smd: 1(-1,0) 2(1,0)
  silkscreen extent -1.8,-0.9 1.8,0.9, body extent -1,-0.62 1,0.63, height 0.78
CH0805R [mm]
  rect 1x1.25 smd: 1(-1,0) 2(1,0)
  silkscreen extent -1.8,-0.9 1.8,0.9, body extent -1,-0.6 1,0.6, height 0.44
CH1206R [mm] "Chip Resistor, 2-Leads, Body 3,0x1,5mm, IPC Low Density"
  rect 1x1.6 smd: 1(-1.5,0) 2(1.5,0)
  silkscreen extent -2.3,-1.1 2.3,1.1, body extent -1.65,-0.8 1.55,0.8, height 0.47
"CON: CWF-2" [mm]
  oct 1.5x1.5 hole 1: 1(-1.25,0)
  round 1.5 hole 1: 2(1.25,0)
  round 0.5 on Mech1: 23(-3.2,-1.7)
  round 0.5 on Top Overlay: 24(-4.5,-2.1)
  silkscreen extent -4.04,-2.41 3.96,3.81, body extent -3.75,-2.18 3.75,3.57, height 7
"CON: CWF-3" [mm]
  oct 1.5x1.5 hole 1: 1(-2.5,0)
  round 1.5 hole 1: 2(0,0) 3(2.5,0)
  round 0.5 on Mech1: 28(-4.5,-1.7)
  silkscreen extent -5.29,-2.41 5.25,3.81, body extent -5,-2.2 5,3.55, height 7
"CON: DC3 2X4P" [mm]
  round 1 hole 0.6 mask+0.05: 1(0,0) 2(0,1.27) 3(1.27,0) 4(1.27,1.27) 5(2.54,0) 6(2.54,1.27) 7(3.81,0) 8(3.81,1.27)
  silkscreen extent -3.17,-1.91 6.98,3.18, body extent -3.1,-1.91 6.91,3.1, height 4.9
"CON: IDC-10MS" [mm] "IDC-10MS 10 pin PCB-mount header"
  oct 1.8x1.8 hole 1.1: 1(-5.08,-1.27)
  round 1.8 hole 1.1: 2(-5.08,1.27) 3(-2.54,-1.27) 4(-2.54,1.27) 5(0,-1.27) 6(0,1.27) 7(2.54,-1.27) 8(2.54,1.27) 9(5.08,-1.27) 10(5.08,1.27)
  silkscreen extent -10.41,-4.83 10.41,4.83, body extent -10.14,-4.57 10.16,4.53, height 9
"CON: IDC-14MS" [mm] "IDC-14MS connector"
  oct 1.8x1.8 hole 1.1: 1(-7.62,-1.27)
  round 1.8 hole 1.1: 2(-7.62,1.27) 3(-5.08,-1.27) 4(-5.08,1.27) 5(-2.54,-1.27) 6(-2.54,1.27) 7(0,-1.27) 8(0,1.27) 9(2.54,-1.27) 10(2.54,1.27) 11(5.08,-1.27) 12(5.08,1.27) 13(7.62,-1.27) 14(7.62,1.27)
  round 0.5 on Mech1: 38(-12.2,-3.9)
  silkscreen extent -12.9,-4.7 12.9,4.6, body extent -12.71,-4.4 12.72,4.4, height 9.1
"CON: PLD-6 (without body)" [mm]
  rect 1.6x1.6 hole 1.1: 1(0,0)
  round 1.6 hole 1.1: 2(0,2.54) 3(2.54,0) 4(2.54,2.54) 5(5.08,0) 6(5.08,2.54)
  silkscreen extent -1,-0.81 6.11,3.5
"CON: PLS-2" [mm]
  rect 2x2 hole 1.1: 1(-1.27,0)
  round 2 hole 1.1: 2(1.27,0)
  silkscreen extent -2.54,-1.27 2.54,1.27, body extent -2.57,-1.28 2.51,1.26, height 8.54
"CON: PLS-4" [mm] "PLS-40 4 pin header"
  rect 2x2 hole 1.1: 1(-3.81,0)
  round 2 hole 1.1: 2(-1.27,0) 3(1.27,0) 4(3.81,0)
  silkscreen extent -5.08,-1.27 5.08,1.27, body extent -5.08,-1.27 5.08,1.27, height 8.54
FPC-30 [mm]
  rect 0.3x1.8 smd mask+0.05: 1(14.5,0) 2(14,0) 3(13.5,0) 4(13,0) 5(12.5,0) 6(12,0) 7(11.5,0) 8(11,0) 9(10.5,0) 10(10,0) 11(9.5,0) 12(9,0) 13(8.5,0) 14(8,0) 15(7.5,0) 16(7,0) 17(6.5,0) 18(6,0) 19(5.5,0) 20(5,0) 21(4.5,0) 22(4,0) 23(3.5,0) 24(3,0) 25(2.5,0) 26(2,0) 27(1.5,0) 28(1,0) 29(0.5,0) 30(0,0)
  rect 2.5x3.2 smd mask+0.05: N(-1.8,1.9) N(16.3,1.9)
  body extent -3.05,-0.3 17.55,4.9, height 2
"IND: IHLP2020" [mm] "SMD inductor, 5.2x5.2x3 mm"
  rect 2.15x2.8 smd: 1(-2.125,0) 2(2.125,0)
  silkscreen extent -2.75,-2.7 2.75,2.7, body extent -2.73,-2.57 2.73,2.58, height 2.89
"OSC: 2520" [mm]
  rect 1.2x1.1 smd: 1(0,0) 2(1.7,0) 3(1.7,1.4) 4(0,1.4)
  round 0.5 on Mech1: 5(-0.075,0.025)
  round 0.5 on Top Overlay: 6(-1.275,-0.6)
  silkscreen extent -0.8,-0.75 2.5,2.15, body extent -0.45,-0.35 2.15,1.75, height 0.55
PLS-2 [mm]
  round 2 hole 0.8: 1(0,0) 2(2.54,0)
SOD123F [mm] "Schottky Diode, 2-Leads, Body 3x2mm, 0.4W"
  rect 1.5x1 smd: 1(-1.375,0) 2(1.375,0)
  round 0.5 on Mech1: ""(1.5,0.5)
  silkscreen extent -2.4,-0.9 2.4,1, body extent -1.87,-0.85 1.88,0.85, height 1.23
SOD323 [mm]
  rect 0.85x0.5 smd: 1(-1.3,0) 2(1.3,0)
  round 0.5 on Mech1: 5(0.7,0.2)
  silkscreen extent -1.9,-0.7 1.9,0.7, body extent -1.15,-0.6 1.15,0.6, height 1.04
SOT23_123 [mm] "SOT23, 3-Leads, Body 3,0x2,6mm (max), Pitch 0,95mm, IPC Medium Density"
  rect 1x0.6 smd: 1(-1.2,0.95) 2(1.2,0) 3(-1.2,-0.95)
  round 0.5 on Mech1: ""(-0.9,1.1)
  silkscreen extent -1.32,-1.5 0.7,1.92, body extent -1.32,-1.52 1.32,1.52, height 1.12
SOT23_132 [mm] "SOT23, 3-Leads, Body 3,0x2,6mm (max), Pitch 0,95mm, IPC Medium Density"
  rect 1x0.6 smd: 1(-1.2,0.95) 2(-1.2,-0.95) 3(1.2,0)
  round 0.5 on Mech1: ""(-0.9,1.1)
  silkscreen extent -1.32,-1.5 0.7,1.92, body extent -1.32,-1.52 1.32,1.52, height 1.12
SOT223 [mm] "SOT223, 4-Leads, Body 6,50x7,00mm (avg), Pitch 2,30mm, IPC Medium Density"
  rect 2.4x1 smd: 1(-2.9,2.3) 2(-2.9,0) 3(-2.9,-2.3)
  rect 2.4x3.3 smd: 4(2.9,0)
  round 0.5 on Mech1: ""(-3,2.7)
  silkscreen extent -3.02,-3.2 1.3,3.47, body extent -3.48,-3.25 3.48,3.25, height 1.65
TANTAL_A [mm]
  rect 1.2x1.6 smd: 1(-1.6,0) 2(1.6,0)
  round 0.5 on Mech1: ""(-1.2,0.4)
  silkscreen extent -2.5,-1.1 2.5,1.1, body extent -1.7,-0.84 1.7,0.84, height 1.71
TANTAL_B [mm]
  rect 1.4x2.4 smd: 1(-1.75,0) 2(1.75,0)
  round 0.5 on Mech1: ""(-1.4,1)
  silkscreen extent -2.7,-1.5 2.7,1.5, body extent -1.85,-1.46 1.85,1.47, height 2.03
TANTAL_C [mm]
  rect 1.6x3.2 smd: 1(-3,0) 2(3,0)
  round 0.5 on Mech1: ""(-2.5,1.1)
  silkscreen extent -4.1,-1.9 4.1,1.9, body extent -3.05,-1.67 3.05,1.68, height 2.7
TANTAL_D [mm]
  rect 2x4.3 smd: 1(-3.85,0) 2(3.85,0)
  round 0.5 on Mech1: ""(-3.1,1.8)
  silkscreen extent -5.15,-2.5 5.15,2.5, body extent -3.7,-2.22 3.7,2.23, height 3.01
TestPoint#1 [mm]
  round 1 smd: 0(0,0)
TestPoint#2 [mm]
  round 1 smd: 0(0.926,0)
TL1014BF160QG [mm]
  rect 1.2x1 smd: 1(-2.8,-0.525) 1(2.8,-0.525) 2(-2.8,-2.225) 2(2.8,-2.225)
  round 0.6 on Top Overlay mask+0.05: 360(4,-0.475)
  round 0.8 hole 0.8: N(0,0) N(0,-2.75)
  body extent -3.2,-4.13 3.2,0.37, height 1.65

## Part data
C1 C2 C3 C4 C5 C6 C7 C8 C9 C10 C11 C12 C13 C14 C15 C16 C17 C19 C20 C21 C22 C23 C24 C25 C26 C28 C32 C33: library part Capacitor
  C1 C4: Model=AC0402JRNPO9BN100
  C2 C3 C5 C6 C7 C8 C9 C15 C17 C19 C22 C24 C28 C33: Model=06035C104JAT2A
  C10 C11 C12: Model=08053C475KAT2A
  C13: Model=0603B105K250NT
  C14 C16: Model=06036D475KAT2A
  C20 C32: Model=GRM21BR71A106KE51
  C21 C25: Model=06035C223JAT2A
  C23: Model=06035A102JAT2A
  C26: Model=CC0603JRNPO9BN390
C18 C27 C34 C35 C36: library part TantalCap
  C18: Model=293D476X9010B2TE3
  C27: Model=293D686X9020D2TE3
  C34: Model=293D686X9010B2TE3
  C35: Model=293D476X96R3A2TE3
  C36: Model=293D475X9035C2TE3
D1: "Cortex-M3", Manufacturer=STMicroelectronics, ComponentKind=64-LQFP, HelpURL=https://www.digikey.com/product-detail/en/stmicroelectronics/STM32F103RBT6/497-6066-ND/1646341, Model=STM32F103RBT6
D2: "RS485", Manufacturer="Analog Devices Inc.", ComponentKind=8-SOIC, HelpURL=https://www.digikey.com/product-detail/en/analog-devices-inc/ADM3485ARZ-REEL7/ADM3485ARZ-REEL7CT-ND/3878705, Model=ADM3485ARZ-REEL7
D6: library part LDL1117S33R, "LDO", Manufacturer=STMicroelectronics, ComponentKind=SOT-223, HelpURL=https://www.digikey.com/product-detail/en/stmicroelectronics/LDL1117S33R/497-17239-1-ND/7102079, Model=LM1117GS-3.3
DA1: library part LM2623AMMX, Model=LM2621AMMX
DA2: library part OP295, Model=OP295GSZ-REEL7
L1: library part Inductor, Model=IHLP2020CZER100M11
R1 R2 R3 R4 R5 R6 R7 R8 R9 R10 R11 R12 R13 R14 R15 R16 R17 R18 R19 R20 R21 R22 R23 R24 R25 R26 R27 R28 R29 R30 R31 R38 R42 R43 R50 R54 R55 R56 R57 R58 R59 R60 R61 R62 R63 R64 R65 R66 R67 R68 R69 R70 R71 R72 R73 R74 R75 R76 R77 R78 R79 R80 R81 R82 R83 R84 R85 R86 R87 R88 R89 R90 R91 R92 R93 R94 R95 R96 R97 R98 R99 R100 R101 R102 R103 R104 R105 R106 R107 R108 R109 R110 R111 R112 R113 R114 R115 R116 R117: library part Resistor
  R1 R2 R4 R7 R8 R11 R20 R24 R27 R28 R29 R31 R114 R115 R116 R117: Model=CR0603-FX-1002ELF
  R3 R54 R55 R56 R57 R90 R91 R92 R93 R96 R97 R105 R106 R107: Model=CR0805-FX-1001ELF
  R5 R6 R13 R14 R58 R59 R60 R61 R70 R71 R72 R73 R78 R79 R80 R81 R94 R98 R99 R108 R109 R110: Model=CR0603-JW-101ELF
  R9: Model=CR0603-FX-49R9ELF
  R10: Model=CR0603-FX-6043ELF
  R15: Model=CR0603-FX-3321ELF
  R16: Model=CR0603-FX-1782ELF
  R17 R22 R62 R63 R64 R65 R74 R75 R76 R77 R82 R83 R84 R85 R95 R100 R101 R111 R112 R113: Model=CR0603-FX-4701ELF
  R18: Model=CR0603-FX-7682ELF
  R19: Model=CR0603-FX-6491ELF
  R21: Model=CR0603-FX-10R0ELF
  R23: Model=CR0603-FX-2701ELF
  R25: Model=CR0603-FX-1303ELF
  R26: Model=CR0603-FX-1502ELF
  R30: Model=CR0603-FX-1004ELF
  R38: Model=CR1206-FX-1200ELF
  R42 R43: Model=CR0603-FX-1201ELF
  R50: Model=JMV0805S5R6T661, Part=JMV0805S5R6T661
SB1 SB2 SB3 SB4 SB5: library part "Tactile switches", "6x6 mm"
  SB1: Model=TL1014BF160QG
  SB2 SB3 SB4 SB5: Model=SKQGADE010
TP1 TP2 TP3 TP4 TP5 TP6 TP7 TP8 TP9: library part TestPoint
VD1 VD2 VD8 VD22 VD23 VD24 VD25: library part "Diod Schottky", Model=PMEG6010CEH
VD3: library part "Diod Schottky Array v.1", Model=BAT54C
VD4: library part "TVS Array", Model=PESD5V0L2BT
VD5 VD18 VD19 VD20 VD21 VD26 VD27 VD28 VD29 VD30 VD31 VD32 VD33 VD34: library part LED_1, Model=KPT-1608SGC
VD6 VD9 VD13 VD17: library part Diod, Part Num=SMAF5.0A, Model=SMF5.0A
VD7: library part Diod, Model=1N4148WS
VT1 VT2 VT3 VT4 VT5 VT6 VT7 VT8 VT9 VT14 VT15 VT16 VT17 VT18 VT19: library part N-chanel, "Mosfet", Model=2N7002
VT10 VT11 VT12 VT13: library part P-chanel, "Mosfet", Model=BSH201,215
X2: library part 10-Connector, Model=KLS1-202-10-T-B
X3: library part 4-Connector, Model=DS1021-1X4
X4: library part 30-Connector, Model=KLS1-242G-2.0-30-T-R
X5 X15: library part 2-Connector
  X5: Model=DNP
  X15: Model=KLS1-2.50-02-S
X6: library part 6(2)-Connector, Model=DS1021-2X3
X7: library part 14-Connector, Model=KLS1-202-14-T-B
X8: library part 8-Connector, Model="DC3 2X4P"
X11: library part 3-Connector, Model=KLS1-2.50-03-S
Z1: library part Oscillator, Model=ECS-120-10-36B2-JTN-TR
X1: Model=DNP

## Free pads (board coordinates)
  round 0.6 hole 0.3 mask+0.05: N(2,50) N(2,55) N(2,60) N(2,65) N(2,70) N(2,75) N(2,80) N(2,85) N(2,90) N(2,95) N(2,100) N(2,105) N(8,65) N(8,70) N(8,75) N(8,80) N(8,85) N(8,90) N(8,95) N(8,100) N(8,105) N(14,65) N(14,70) N(14,75) N(14,80) N(14,85) N(14,90) N(14,95) N(14,100) N(14,105) N(20,65) N(20,70) N(20,75) N(26,65) N(26,70) N(26,75) N(33,6) N(33,9) N(37,6) N(37,9) N(41,6) N(41,9) N(45,9) N(45.675,56.475) N(46.825,57.55) N(47.5,17.5) N(49,19) N(50.5,17.5) N(52,19) N(54.5,19) N(56,17.5) N(57.1,19) N(67,31) N(69,26) N(71,31) N(73,26) N(107,80) N(107,85) N(107,90) N(107,95) N(107,100) N(107,105) N(113,80) N(113,85) N(113,90) N(113,95) N(113,100) N(113,105) N(119,80) N(119,85) N(119,90) N(119,95) N(119,100) N(119,105)
  round 10 hole 7 mask+0.05: N(5.5,5.5) N(5.5,115.5) N(115.5,5.5) N(115.5,115.5)
  rect 0.8x0.8 smd mask+0.05: N(18.225,34.35) N(40.625,41.925) N(40.628,44.006)
  round 7 hole 7 mask+0.05: N(60.5,44.5)

## Via types
v1: diameter 0.6, hole 0.3, Top Layer to Bottom Layer, tented both sides, 85 vias
v2: diameter 0.8, hole 0.4, Top Layer to Bottom Layer, tented both sides, 42 vias
v3: diameter 0.4, hole 0.2, Top Layer to Bottom Layer, tented both sides, 4 vias
v4: diameter 0.6, hole 0.3, Top Layer to Bottom Layer, 1 vias

## Nets (pads, with @x,y where several pads share a name; then routed paths per layer and width w, separated by ;. In a path a pad name is that pad's centre, name@x,y a point inside that pad or via, vN(x,y) a via of type N, cw(c..) or ccw(c..) an arc to the next point about the centre after c; other vN are vias at no path point)
3.3V: C2.2 C3.2 C5.2 C6.2 C7.2 C8.2 C14.2 C15.2 C16.2 C17.2 C28.2 C35.1 D1.1@28.375,30.4 D1.13 D1.19 D1.32 D1.48 D1.64 D2.8 D6.2 D6.4 R2.2 R42.2 R114.2 R115.2 R116.2 R117.2 VD1.2 X1.2 X4.24 X4.26 | length 382.5
  Top Layer w0.3: C2.2@25.5,22.3 25.712,22.512 26.174,22.512 26.35,22.688 26.35,23.475 27.275,24.4 D1.13@28.375,24.4 ; C8.2@26.075,31.15 26.075,30.576 26.251,30.4 D1.1@28.375,30.4 ; C3.2@29.8,34.5 29.95,34.35 29.95,33.65 30.325,33.275 D1.64@30.325,32.35 ; C7.2@31.099,18.549 31.325,18.775 D1.19@31.325,20.95 ; 37.825,20.2 D1.32@37.825,20.95 38.5,20.95 39.5,19.95 39.5,18.625 C6.2@39.45,18.575 ; D1.48@39.775,30.4 41.275,30.4 41.6,30.725 C5.2@42.975,30.725 ; C16.2@47.975,60.375 47.975,62.7 49.4,64.125 54.775,64.125 55.2,63.7 X4.26@55.2,59.25 55.2,57.9 55.2,57.425 ; C14.2@54.725,56.35 55,56.625 55,57.225 55.2,57.425 ; X4.24@56.2,59.25 56.2,57.601 56.024,57.425 55.2,57.425
  Top Layer w0.6: R2.2@5,38.9 5,36.975 11.5,30.475 v2(15.625,30.475) ; C15.2@54.725,54.725 54.75,54.7 v2(54.75,53.8) ; C28.2@76.425,17.875 76.425,16.251 76.074,15.9 D2.8@74.83,15.9 74.83,14.795 75.175,14.45 75.175,13.925 R42.2@75.1,13.85 76.75,13.85 77,14.1 77.1,14.1 v2(84.325,21.325)
  Top Layer w0.8: v2(21.05,25.1) 20.575,25.575 20.575,29.9 23.8,33.125 26.075,33.125 ; v2@21.075,25.1 21.075,24.125 22.9,22.3 ; VD1.2@23,17.95 22.9,18.05 22.9,22.3 ; C8.2@26.075,31.15 26.075,33.125 ; C7.2@31.099,18.549 31.099,17.25 ; C6.2@39.45,18.575 39.45,17.425 39.625,17.25 ; v2(42.375,62.45) 44.45,60.375 C17.2@46,60.375 47.975,60.375 C16.2@48,60.375 ; C5.2@42.975,30.725 C5.2@43,30.7 44.625,30.7 45.54,31.615 X1.2@45.54,34 45.246,34 41.696,37.55 32.15,37.55 29.825,35.225 29.825,34.525 C3.2@29.8,34.5 27.45,34.5 26.075,33.125 ; C15.2@54.725,54.725 C14.2@54.725,56.35 ; D6.4@59.875,15.4 D6.2@54.075,15.4 43.275,15.4 41.425,17.25 39.625,17.25 ; v2(84.275,55.725) 85.325,54.675 v2(85.325,52.625) ; v2(85.325,33.35) v2(85.325,36.55) ; 22.9,22.3 C2.2@25.5,22.3 25.5,19.125 27.375,17.25 31.099,17.25 ; 31.099,17.25 39.625,17.25
  Top Layer w1: D6.4@59.875,15.4 60.425,15.95 60.425,17.825 60.888,18.287 ; C35.1@61.275,20.7 61.275,18.675 60.888,18.287 ; v2(62,17.975) 61.688,18.287 60.888,18.287
  Bottom Layer w0.6: v2(15.625,30.475) 21,25.1 v2(21.05,25.1) 21.104,25.1 21.654,24.55 23.274,24.55 23.625,24.901 23.625,26.675 R117.2@23.5,26.8 ; v2(54.75,53.8) 73.075,53.8 76.2,56.925 84.275,56.925 v2(84.275,55.725)
  Bottom Layer w0.8: R115.2@26.9,59.9 26.9,61.631 27.719,62.45 v2(42.375,62.45) ; 84.275,23.675 84.275,21.325 88.775,16.825 114.575,16.825 117.825,20.075 117.825,26.75 111.55,33.025 96.775,33.025 93.342,29.592 88.433,29.592 85.325,32.7 v2(85.325,33.35) ; 84.3,23.7 R116.2@84.3,26.9 ; v2(85.325,36.55) v2(85.325,52.625)
  Bottom Layer w1: v2(62,17.975) 68.925,17.975 77.85,26.9 R116.2@84.3,26.9
5/10V_OUT: D1.17 R13.2 | length 53.1
  Top Layer w0.3: R13.2@4.6,53.275 4.612,53.262 4.612,50.188 v1(6.8,48) ; v1(29,21.375) 29.081,21.375 29.506,20.95 D1.17@30.325,20.95
  Bottom Layer w0.3: v1(6.8,48) 6.8,42.57 2.75,38.52 2.75,36.95 4.125,35.575 5.75,35.575 19.95,21.375 v1(29,21.375)
5V: C18.1 C20.2 C24.2 C32.2 C33.2 C34.1 D6.3 DA1.6 DA1.7 L1.2 R3.2 R11.1 R18.1 R29.1 R54.2 R55.2 R56.2 R57.2 R96.2 R97.2 R105.2 R106.2 R107.2 VD2.2 VD3.2 VD6.2 VD17.2 X3.1 X6.1 X8.1 X15.1 | length 461.1
  Top Layer w0.4: DA1.7@29.75,54.375 DA1.6@29.75,53.725 31.65,53.725 C24.2@31.85,53.525
  Top Layer w0.6: VD3.2@3.777,22.266 3.777,18.789 4.175,18.391 7.075,18.391 8.415,19.731 X3.1@11.725,19.731 ; v2(7.75,44.35) 7.75,39.3 8.85,38.2 12.074,38.2 12.425,37.849 12.425,37.3 R29.1@12.375,37.25 ; C32.2@53.375,20.7 C33.2@50.975,20.7 50.975,22.85 52.9,24.775 55.95,24.775 56.35,25.175 56.35,27.525 R3.2@56.425,27.6 ; R55.2@82.775,62.925 82.787,62.912 84.613,62.912 v2(84.625,62.9) ; v2(102.3,29) 103.675,27.625 VD17.2@108.275,27.625 109.775,27.625 111.175,29.025 ; v2(112.7,62.9) 112.7,60.825 111.3,59.425 111.3,29.15 111.175,29.025 ; X8.1@115.15,25.175 111.3,29.025 111.175,29.025
  Top Layer w0.8: VD6.2@14.3,22.45 14.3,20.199 13.831,19.731 X3.1@11.725,19.731 11.725,8.05 16.55,3.225 VD2.2@25.2,3.225 ; v2(18.875,50.375) 19.775,49.475 20.8,49.475 R11.1@20.825,49.45 20.85,49.425 20.85,48.325 22.175,47 27.106,47 28.006,47.9 28.675,47.9 R18.1@28.7,47.925 C18.1@30.675,47.925 ; C18.1@30.975,47.6 31.275,47.3 31.275,46.094 31.744,45.625 35.41,45.625 36.825,47.04 ; C24.2@31.85,53.525 C20.2@33.575,53.525 ; v2(40.65,58.975) 39.325,60.3 L1.2@32.95,60.3 ; X6.1@46.96,47.04 36.825,47.04 ; C32.2@53.375,20.7 53.375,22.956 53.844,23.425 62.375,23.425 63.9,21.9 63.9,13.35 62.525,11.975 56.5,11.975 55.475,13 54.175,13 D6.3@54.075,13.1 ; R55.2@82.775,62.925 R57.2@80.775,62.925 R56.2@78.775,62.925 R54.2@76.775,62.925 71.353,62.925 70.978,63.3 70.942,63.3 69.393,64.85 35.775,64.85 33.125,62.2 33.125,60.475 L1.2@32.95,60.3 ; L1.2@32.95,60.3 32.95,56.9 33.575,56.275 C20.2@33.575,53.525 ; C20.2@33.575,53.525 34.85,53.525 36.825,51.55 36.825,47.04
  Top Layer w1: VD2.2@25.2,3.225 25.248,3.225 25.248,1.902 26.1,1.05 53.575,1.05 X15.1@55.925,3.4 55.925,6.225 55.325,6.825 C34.1@55.325,9.9 55.325,10.4 55.125,10.6 54.161,10.6 53.575,11.186 53.575,13.1 D6.3@54.075,13.1
  Bottom Layer w0.3: R107.2@39,29 40.775,29 43.65,31.875 48.1,31.875 48.376,32.151 48.376,36.309 43.575,41.109 43.575,44.495 43.55,44.52 43.55,46.7 45.75,48.9 49.625,48.9 50.85,47.675 50.85,45.976 50.674,45.8 47.136,45.8 47.136,46.864 X6.1@46.96,47.04
  Bottom Layer w0.6: v2(7.75,44.35) 12.85,44.35 19.5,51 R105.2@21,51 ; v2(84.625,62.9) 88.525,62.9 91.6,65.975 100.425,65.975 102.625,63.775 102.625,59.6 102.025,59 ; R106.2@100,29 v2(102.3,29) ; R96.2@100,59 102.025,59 ; v2(112.7,62.9) 112.646,62.9 111.801,63.745 109.845,63.745 105.1,59 102.025,59
  Bottom Layer w0.8: v2(7.75,44.35) 7.75,49 7.281,49.469 6.619,49.469 5.675,48.525 5.675,43.35 1.925,39.6 1.925,27.3 3.85,25.375 7.95,25.375 9.65,23.675 9.65,20.119 10.119,19.65 11.644,19.65 X3.1@11.725,19.731 ; R97.2@39,59 40.625,59 v2(40.65,58.975)
12V: C10.2 C11.2 C22.2 C26.2 C27.1 DA2.8 R25.1 R28.1 R30.1 VD8.2 X4.3 X4.29 | length 159.5
  Top Layer w0.3: C10.2@51.725,56.8 51.75,56.825 51.75,57.849 51.926,58.025 ; X4.29@53.7,59.25 53.7,58.201 53.524,58.025 51.926,58.025 ; v1(54.025,63.4) 54,63.425 50.075,63.425 49.55,62.9 49.55,59.15 50.675,58.025 51.926,58.025 ; v1(65.7,63.4) 66.7,62.4 X4.3@66.7,59.25 66.7,57.7 67,57.4 67.974,57.4 68.15,57.224 C11.2@68.15,56.775
  Top Layer w0.6: v2(6.8,41.3) 6.8,38.45 R28.1@9.225,36.025 ; C22.2@9.5,56.075 9.5,59 10.275,59.775 C27.1@12.55,59.775 ; C27.1@13.7,59.775 v2(20.575,59.775) 22.575,57.775 25.15,57.775 VD8.2@25.275,57.9 ; DA2.8@20.208,42.804 21.167,42.804 21.221,42.75 v2(21.275,42.75) 21.3,42.775 22.617,42.775 R30.1@22.646,42.804
  Top Layer w0.8: v2(10.925,50.05) 16.1,50.05 20.675,45.475 v2(26.25,45.475) ; v2(10.975,56.7) 11.95,57.675 11.95,59.175 12.55,59.775 C27.1@13.7,59.775 ; R25.1@22.95,49.45 22.975,49.425 22.975,48.719 23.444,48.25 24.975,48.25 25.025,48.2 26.175,48.2 v2(26.275,48.1)
  Bottom Layer w0.3: v2(20.575,59.775) 20.575,61.525 22.45,63.4 v1(54.025,63.4) v1(65.7,63.4)
  Bottom Layer w0.6: v2(6.8,41.3) 8.304,42.804 20.575,42.804 20.591,42.788 21.237,42.788 v2(21.275,42.75)
  Bottom Layer w0.8: v2(10.925,50.05) 10.925,56.65 v2(10.975,56.7) ; v2(21.275,42.75) 21.275,41.644 21.744,41.175 24.85,41.175 26.275,42.6 26.275,45.45 v2(26.25,45.475) 26.275,45.5 v2(26.275,48.1)
ADC0: C21.2 D1.9 R14.1 | length 23.8
  Top Layer w0.3: v1(21.475,38.175) 21.61,38.175 21.835,38.4 22.425,38.4 C21.2@22.825,38.8 ; D1.9@28.375,26.4 29.619,26.4 32.019,28.8 v1(32.1,28.8)
  Top Layer w0.6: C21.2@22.825,38.8 23.3,38.8 23.975,39.475 23.975,40.125 R14.1@24.1,40.25
  Bottom Layer w0.3: v1(21.475,38.175) 23.9,38.175 32.1,29.975 v1(32.1,28.8)
ADC1: D1.10 R23.1 R28.2 | length 25.2
  Top Layer w0.3: R23.1@10.85,33.675 10.975,33.55 11.075,33.55 11.075,32.728 11.853,31.95 v1(11.975,31.95) ; v1(23.975,24.15) 24.425,24.6 26.201,24.6 27.501,25.9 D1.10@28.375,25.9
  Top Layer w0.6: R28.2@9.225,34.475 9.225,34.026 9.576,33.675 R23.1@10.85,33.675
  Bottom Layer w0.3: v1(11.975,31.95) 20.2,23.725 23.469,23.725 23.894,24.15 v1(23.975,24.15)
ADC2: D1.11 R24.1 R29.2 | length 33.8
  Top Layer w0.3: R29.2@10.96,37.234 R29.2@10.975,37.25 10.975,36.475 v1(13.65,36.475) ; D1.11@28.375,25.4 30.075,25.4 v1(32.95,28.275)
  Top Layer w0.6: R24.1@10.944,35.491 10.96,35.506 10.96,36.475 R29.2@10.96,37.234
  Bottom Layer w0.3: v1(13.65,36.475) 22,28.125 32.719,28.125 32.869,28.275 v1(32.95,28.275)
AIN: R27.1 R30.2 R31.1 X7.1 | length 142.5
  Top Layer w0.3: R31.1@25.8,42.8 31.95,42.8 34.7,40.05 46.3,40.05 49.05,37.3 68.224,37.3 68.4,37.476 68.4,49.6 74.975,56.175 74.975,61.524 75.376,61.925 86.475,61.925 v2(95.85,71.3)
  Top Layer w0.6: R27.1@18.575,37.35 18.575,43.499 18.926,43.85 23.599,43.85 23.95,43.499 23.95,42.925 R30.2@24.075,42.8 R31.1@25.8,42.8
  Bottom Layer w0.3: v2(95.85,71.3) 100.95,71.3 105.975,66.275 113.675,66.275 114.975,64.975 X7.1@114.975,55.125
BOOT: C9.2 D1.60 D1.61 R1.2 X1.1 | length 19.8
  Top Layer w0.3: D1.61@31.825,32.35 D1.60@32.325,32.35 32.325,31.501 32.501,31.325 38.3,31.325 39.55,32.575 39.55,32.825 40.725,34 X1.1@43,34
  Top Layer w0.8: R1.2@37.5,36.2 C9.2@39.5,36.2 40.8,36.2 X1.1@43,34
BS0: R7.2 X4.16 | length 4.1
  Top Layer w0.3: X4.16@60.2,59.25 60.2,58.25 61.2,57.25 61.874,57.25 62.05,57.074 R7.2@62.05,56.275
BS1: R8.2 X4.17 | length 3.4
  Top Layer w0.3: X4.17@59.7,59.25 59.7,58 60.65,57.05 R8.2@60.65,56.275
CS: D1.56 X4.19 | length 43.2
  Top Layer w0.3: D1.56@34.325,32.35 34.325,33.475 34.618,33.768 34.618,34.293 v1(34.675,34.35) ; X4.19@58.7,59.25 58.7,58.125 v1(59.225,57.6)
  Bottom Layer w0.3: v1(34.675,34.35) 34.675,41.55 51.7,58.575 58.25,58.575 v1(59.225,57.6)
DAC: D1.20 R15.2 | length 37.3
  Top Layer w0.3: v1(9.15,39.6) 9.231,39.6 9.331,39.7 10.525,39.7 R15.2@10.55,39.725 ; v1(29.025,22.175) 29.75,22.175 30.5,22.925 31.649,22.925 31.825,22.749 D1.20@31.825,20.95
  Bottom Layer w0.3: v1(9.15,39.6) 9.15,33.175 20.15,22.175 v1(29.025,22.175)
DS: D1.58 X4.18 | length 46.6
  Top Layer w0.3: D1.58@33.325,32.35 33.325,34.144 33.425,34.244 v1(33.425,34.325) ; X4.18@59.2,59.25 v1(59.2,62.1)
  Bottom Layer w0.3: v1(33.425,34.325) 33.425,41.975 53.55,62.1 v1(59.2,62.1)
ENC_A: D1.22 X6.5 | length 50
  Top Layer w0.3: v1(32.8,18.9) 32.825,18.925 D1.22@32.825,20.95 ; v1(44.825,41.825) 44.906,41.825 45.061,41.98 46.94,41.98 X6.5@46.96,41.96
  Bottom Layer w0.3: v1(32.8,18.9) 32.8,16.975 33.2,16.575 41.2,16.575 55.075,30.45 55.075,31.05 44.882,41.243 44.882,41.768 v1(44.825,41.825)
ENC_B: D1.23 X6.2 | length 58
  Top Layer w0.3: D1.23@33.325,20.95 33.325,19.3 33.45,19.175 v1(33.45,18.375) ; X6.2@49.5,46.9 X6.2@49.5,47.04
  Bottom Layer w0.3: v1(33.45,18.375) 33.45,17.276 33.626,17.1 40.95,17.1 54.35,30.5 54.35,30.971 44.1,41.221 44.1,42.6 45.6,44.1 45.6,47.925 46.05,48.375 49.3,48.375 49.5,48.175 X6.2@49.5,47.04
ENC_KEY: D1.21 X6.3 | length 53
  Top Layer w0.3: v1(32.175,18.425) 32.175,19.175 32.325,19.325 D1.21@32.325,20.95
  Bottom Layer w0.3: v1(32.175,18.425) 32.175,16.575 32.7,16.05 41.425,16.05 55.65,30.275 55.65,31.4 45.6,41.45 45.6,43.14 X6.3@46.96,44.5